# Altium PCB MSM8916_board.PcbDoc (part 1 of 2)
Units mil, origin at the board's own origin, x right, y up, seen from the top; angles counter-clockwise.
Board outline 1181.46 x 1183.49 mil, 2 copper layers (Top Layer, Bottom Layer); 218 components, 226 nets, 1647 pads, 0 vias.
Unrouted connection lines stored in the file: 1143.
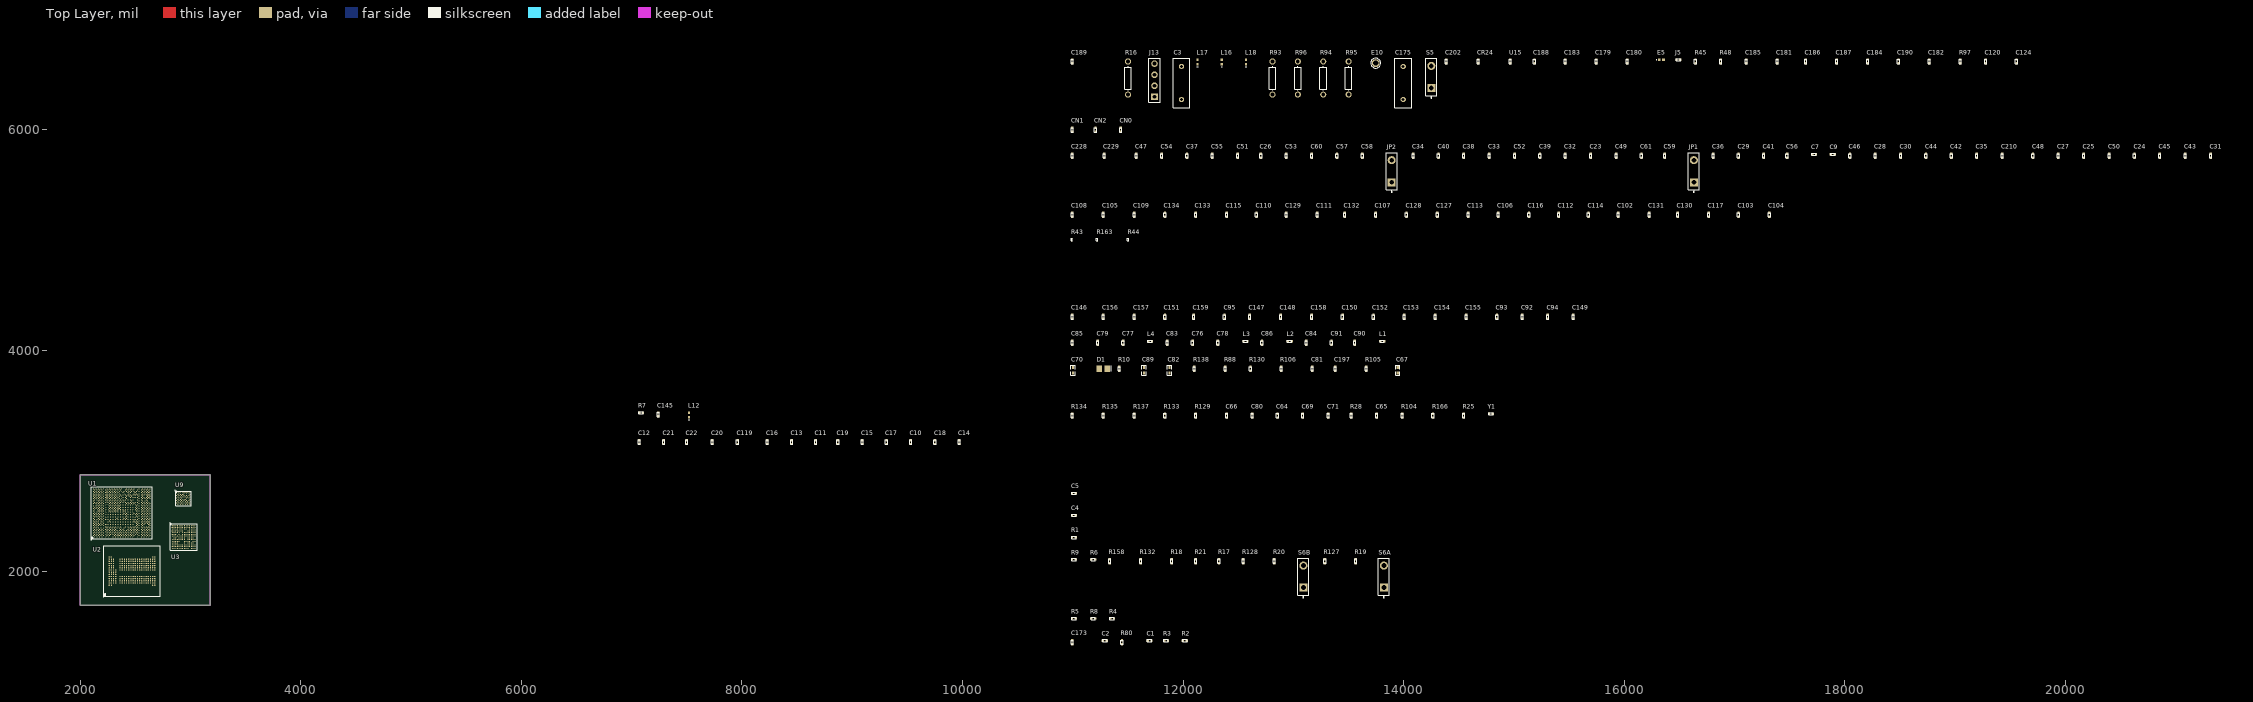
[diagram p0: Top Layer view]
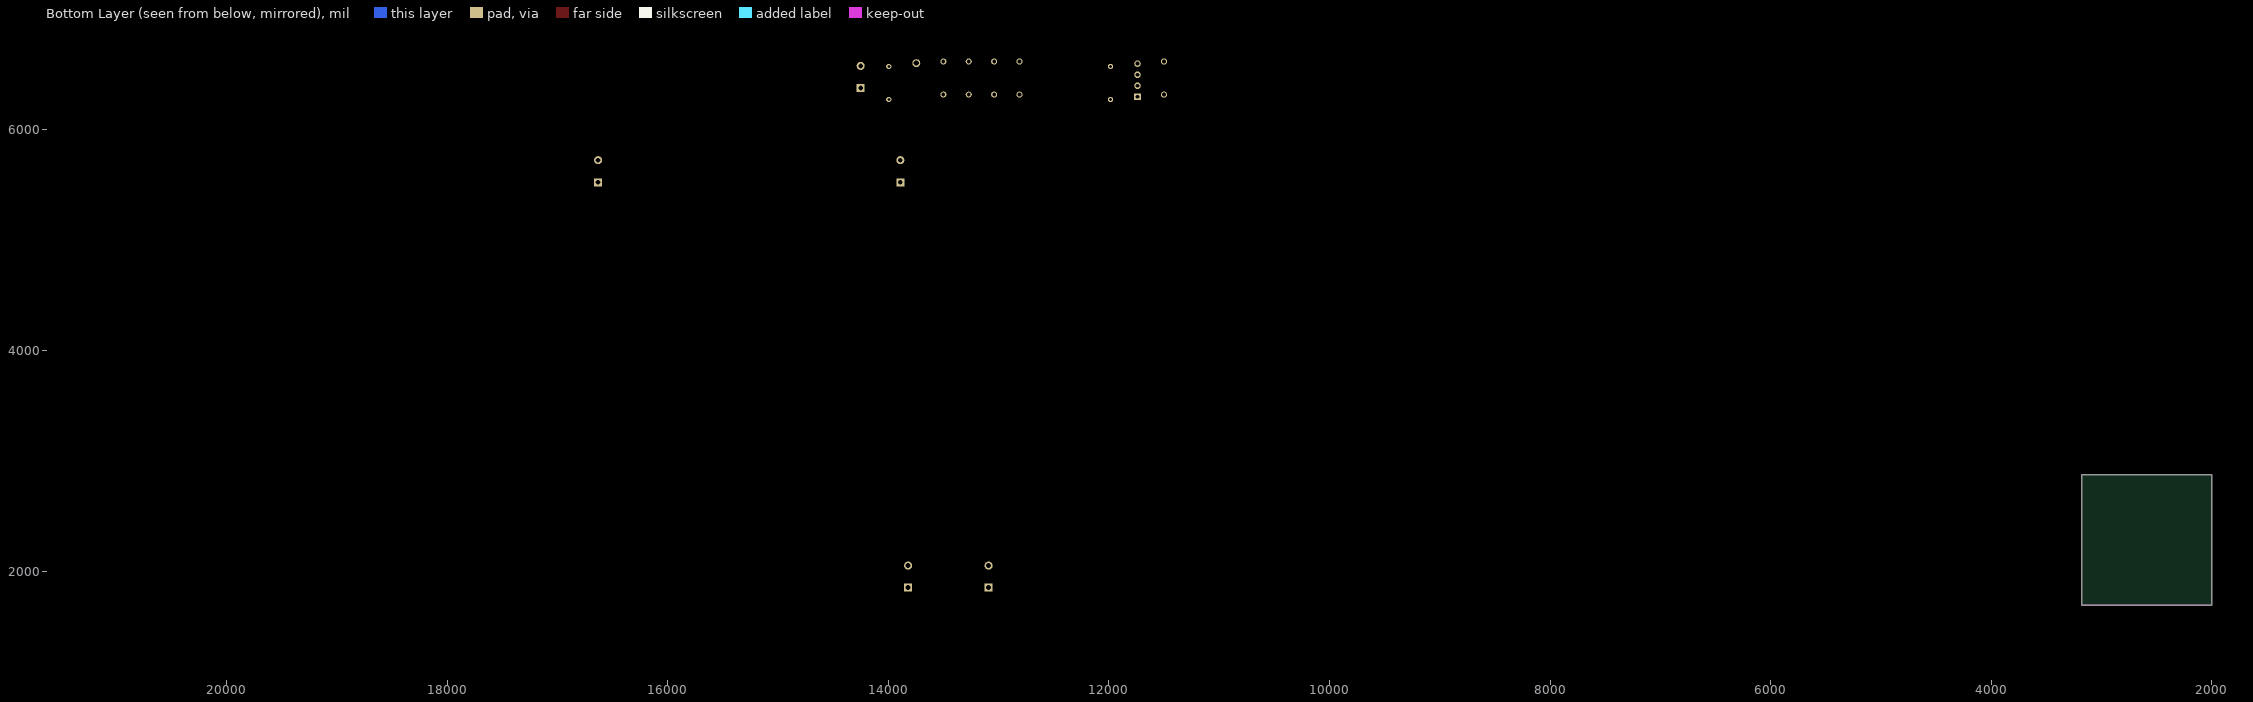
[diagram p1: Bottom Layer view, seen from below]

## Layer stack, top to bottom
Top Solder: solder mask 0.4, Solder Resist, Dk 3.5
Top Layer: signal copper 1.4
Dielectric 1: dielectric 12.6, FR-4, Dk 4.8
Bottom Layer: signal copper 1.4
Bottom Solder: solder mask 0.4, Solder Resist, Dk 3.5

## Board outline
2000,1690 2000,2871.1 2000.35,2873.49 3181.46,2873.49 3181.46,1692.38 3181.1,1690

## Design rules (kind name [scope] priority, off if disabled: settings)
Clearance [All] p1: gap=4 ignorepadtopadclearanceinfootprint=FALSE
DiffPairsRouting [All] p1: maxlimit=10 minlimit=10 mostfreqgap=10 toplayer_minwidth=10 toplayer_maxwidth=15 toplayer_prefwidth=15 bottomlayer_minwidth=10 bottomlayer_maxwidth=15 bottomlayer_prefwidth=15 maxuncoupledlength=500
PolygonConnect [All] p1: connectstyle=Relief reliefconductorwidth=10 reliefentries=4 polygonreliefangle="90 Angle" airgapwidth=10
RoutingVias [All] p1: holewidth=28 width=50 viastyle="Through Hole" minholewidth=28 minwidth=50 maxholewidth=28 maxwidth=50
SolderMaskExpansion [All] p1: expansion=4 istentingtop=FALSE
Width [All] p1: maxlimit=32 minlimit=6 preferedwidth=10
29 further rules are at their usual default settings.

## Classes and differential pairs
component class "SD Card_WCN_RF": C3 C120 C124 C175 C179 C180 C181 C182 C183 C184 C185 C186 C187 C188 C189 C190 C202 CR24 E5 E10 FL1 J5 J13 L16 L17 L18 R16 R45 R48 R93 R94 R95 R96 R97 S5 U9 U15
component class INTERFACE_PWR_LS_HS: CN0 CN1 CN2
component class BYPASS_CAP: C7 C9 C23 C24 C25 C26 C27 C28 C29 C30 C31 C32 C33 C34 C35 C36 C37 C38 C39 C40 C41 C42 C43 C44 C45 C46 C47 C48 C49 C50 C51 C52 C53 C54 C55 C56 C57 C58 C59 C60 C61 C210 C228 C229 JP1 JP2
component class "21 MEMORY_POWER": C102 C103 C104 C105 C106 C107 C108 C109 C110 C111 C112 C113 C114 C115 C116 C117 C127 C128 C129 C130 C131 C132 C133 C134
component class "20 MEMORY_CONTROL": R43 R44 R163 U2
component class "17 PM8916_LDO": C92 C93 C94 C95 C146 C147 C148 C149 C150 C151 C152 C153 C154 C155 C156 C157 C158 C159
component class "16 PM8916_SMPS": C76 C77 C78 C79 C83 C84 C85 C86 C90 C91 L1 L2 L3 L4
component class "15 PM8916_CHARGING GPIO": C67 C70 C81 C82 C89 C197 D1 R10 R88 R105 R106 R130 R138 U3
component class "14 PM8916_CONTROL CLOCK": C64 C65 C66 C69 C71 C80 R25 R28 R104 R129 R133 R134 R135 R137 R166 Y1
component class "13 MSM8916_GND NC": C145 L12 R7
component class "12 MSM8916_POWER3": C10 C11 C12 C13 C14 C15 C16 C17 C18 C19 C20 C21 C22 C119
component class "11 MSM8916_POWER2": C5
component class "10 MSM8916_POWER1": C4
component class 08_MSM8916_RF: R1
component class 07_MSM8916_GPIO: R6 R9 R17 R18 R19 R20 R21 R127 R128 R132 R158 S6A S6B
component class "06_MSM8916_EBIO LPDDR3": R4 R5 R8
component class "05 MSM8916_CONTROL": C1 C2 C173 R2 R3 R80 U1

## Components (designator, comment, footprint, x,y, rotation, side; value= is the part's Value field where it differs from the comment)
C1 "0.1UF" c0402 11695,1370 r0 top
C2 "33pF" c0402 11290,1370 r0 top
C3 "Cap" RAD-0.3 11985,6425 r90 top value=100pF
C4 "0.1uF" c0402 11010,2505 r0 top
C5 "0.1uF" c0402 11010,2705 r0 top
C7 "0.1uF" C0402 17720,5780 r0 top value="10% 6.3V"
C9 "0.1uF" C0402 17890,5780 r0 top value="10% 6.3V"
C10 "0.1uF" c0402 9530,3170 r90 top
C11 "0.1uF" c0402 8670,3170 r90 top
C12 "0.1uF" c0402 7070,3170 r90 top
C13 "0.1uF" c0402 8450,3170 r90 top
C14 "0.1uF" c0402 9970,3170 r90 top
C15 "0.047uF" c0402 9090,3170 r90 top
C16 "0.1uF" c0402 8230,3170 r90 top
C17 "0.047uF" c0402 9310,3170 r90 top
C18 "0.1uF" c0402 9750,3170 r90 top
C19 "0.047uF" c0402 8870,3170 r90 top
C20 "0.1uF" c0402 7730,3170 r90 top
C21 "0.1uF" c0402 7290,3170 r90 top
C22 "0.1uF" c0402 7500,3170 r90 top
C23 "1uF" C0402 15695,5765 r90 top value="10% 6.3V"
C24 "4700pF" C0402 20625,5765 r90 top value="20% 10V"
C25 "1uF" C0402 20165,5765 r90 top value="20% 6.3V"
C26 "4700pF" C0402 12705,5765 r90 top value="10% 6.3V"
C27 "1uF" C0402 19935,5765 r90 top value="20% 6.3V"
C28 "0.1uF" C0402 18275,5765 r90 top value="10% 6.3V"
C29 "0.1uF" C0402 17035,5765 r90 top value="10% 6.3V"
C30 "0.1uF" C0402 18505,5765 r90 top value="10% 6.3V"
C31 "0.047uF" C0402 21315,5765 r90 top value="20% 10V"
C32 "0.022uF" C0402 15465,5765 r90 top value="10% 6.3V"
C33 "0.022uF" C0402 14775,5765 r90 top value="10% 6.3V"
C34 "0.047uF" C0402 14085,5765 r90 top value="10% 6.3V"
C35 "0.1uF" C0402 19195,5765 r90 top value="10% 6.3V"
C36 "0.1uF" C0402 16805,5765 r90 top value="10% 6.3V"
C37 "2200pF" C0402 12035,5765 r90 top value="10% 6.3V"
C38 "0.047uF" C0402 14545,5765 r90 top value="10% 6.3V"
C39 "0.022uF" C0402 15235,5765 r90 top value="10% 6.3V"
C40 "0.047uF" C0402 14315,5765 r90 top value="10% 6.3V"
C41 "0.1uF" C0402 17265,5765 r90 top value="10% 6.3V"
C42 "0.1uF" C0402 18965,5765 r90 top value="10% 6.3V"
C43 "0.047uF" C0402 21085,5765 r90 top value="20% 10V"
C44 "0.1uF" C0402 18735,5765 r90 top value="10% 6.3V"
C45 "0.047uF" C0402 20855,5765 r90 top value="20% 10V"
C46 "0.1uF" C0402 18045,5765 r90 top value="10% 6.3V"
C47 "0.022uF" C0402 11575,5765 r90 top value="10% 6.3V"
C48 "1uF" C0402 19705,5765 r90 top value="20% 6.3V"
C49 "22uF" C0402 15925,5765 r90 top value="10% 6.3V"
C50 "1uF" C0402 20395,5765 r90 top value="20% 6.3V"
C51 "0.01uF" C0402 12495,5765 r90 top value="10% 6.3V"
C52 "0.022uF" C0402 15005,5765 r90 top value="10% 6.3V"
C53 "22uF" C0402 12935,5765 r90 top value="10% 6.3V"
C54 "2200pF" C0402 11805,5765 r90 top value="10% 6.3V"
C55 "2200pF" C0402 12265,5765 r90 top value="10% 6.3V"
C56 "0.1uF" C0402 17475,5765 r90 top value="10% 6.3V"
C57 "22uF" C0402 13395,5765 r90 top value="10% 6.3V"
C58 "4700pF" C0402 13625,5765 r90 top value="10% 6.3V"
C59 "4.7uF" C0402 16365,5765 r90 top value="10% 6.3V"
C60 "22uF" C0402 13165,5765 r90 top value="10% 6.3V"
C61 "22uF" C0402 16155,5765 r90 top value="10% 6.3V"
C64 "0.1uF" c0402 12855,3410 r90 top
C65 "0.1uF" c0402 13755,3410 r90 top
C66 "0.1uF" c0402 12395,3410 r90 top
C67 "0.1uF" 0402C 13945,3820 r90 top
C69 "1uF" c0402 13085,3410 r90 top
C70 "0.1uF" 0402C 11000,3820 r90 top value="6.3V 10%"
C71 "1uF" c0402 13315,3410 r90 top
C76 "22uF" c0402 12085,4070 r90 top
C77 "22uF" c0402 11455,4070 r90 top
C78 "22uF" c0402 12315,4070 r90 top
C79 "22uF" c0402 11225,4070 r90 top
C80 "1000pF" c0402 12625,3410 r90 top
C81 "47uF" c0402 13170,3835 r90 top
C82 "0.1uF" 0402C 11875,3820 r90 top
C83 "2.2uF" c0402 11855,4070 r90 top
C84 "2.2uF" c0402 13115,4070 r90 top
C85 "2.2uF" c0402 10995,4070 r90 top
C86 "2.2uF" c0402 12715,4070 r90 top
C89 "0.1uF" 0402C 11645,3820 r90 top
C90 "22uF" c0402 13555,4070 r90 top
C91 "22uF" c0402 13345,4070 r90 top
C92 "4.7uF" c0402 15075,4305 r90 top
C93 "4.7uF" c0402 14845,4305 r90 top
C94 "4.7uF" c0402 15305,4305 r90 top
C95 "4.7uF" c0402 12375,4305 r90 top
C102 "0.1uF 10% 6.3V" c0402 15945,5230 r90 top
C103 "0.1uF 10% 6.3V" C0402 17035,5230 r90 top
C104 "0.1uF 10% 6.3V" c0402 17315,5230 r90 top
C105 "0.1uF 10% 6.3V" C0402 11275,5230 r90 top
C106 "0.1uF 10% 6.3V" C0402 14855,5230 r90 top
C107 "2.2uF 10% 6.3V" c0402 13745,5230 r90 top
C108 "0.1uF 10% 6.3V" C0402 10995,5230 r90 top
C109 "0.1uF 10% 6.3V" C0402 11555,5230 r90 top
C110 "1uF 10% 6.3V" C0402 12665,5230 r90 top
C111 "0.1uF 10% 6.3V" C0402 13215,5230 r90 top
C112 "0.1uF 10% 6.3V" C0402 15405,5230 r90 top
C113 "0.1uF 10% 6.3V" c0402 14585,5230 r90 top
C114 "0.1uF 10% 6.3V" C0402 15675,5230 r90 top
C115 "1uF 10% 6.3V" C0402 12395,5230 r90 top
C116 "0.1uF 10% 6.3V" C0402 15135,5230 r90 top
C117 "0.1uF 10% 6.3V" C0402 16765,5230 r90 top
C119 "0.1uF" c0402 7960,3170 r90 top
C120 "33pF" C0402 19275,6620 r90 top value="5% 50V"
C124 "1uF" C0402 19555,6620 r90 top value="20% 6.3V"
C127 "2.2uF 10% 6.3V" c0402 14305,5230 r90 top
C128 "0.1uF 10% 6.3V" c0402 14025,5230 r90 top
C129 "0.1uF 10% 6.3V" C0402 12935,5230 r90 top
C130 "1uF 10% 6.3V" C0402 16485,5230 r90 top
C131 "1uF 10% 6.3V" C0402 16225,5230 r90 top
C132 "0.1uF 10% 6.3V" C0402 13465,5230 r90 top
C133 "4.7uF 10% 6.3V" C0402 12115,5230 r90 top
C134 "4.7uF 10% 6.3V" C0402 11835,5230 r90 top
C145 "2.2uF" C0402 7240,3420 r90 top value="10% 10V"
C146 "1.0uF" c0402 10995,4305 r90 top
C147 "1.0uF" c0402 12605,4305 r90 top
C148 "1.0uF" c0402 12885,4305 r90 top
C149 "1.0uF" c0402 15535,4305 r90 top
C150 "1.0uF" c0402 13445,4305 r90 top
C151 "1.0uF" c0402 11835,4305 r90 top
C152 "1.0uF" c0402 13725,4305 r90 top
C153 "1.0uF" c0402 14005,4305 r90 top
C154 "1.0uF" c0402 14285,4305 r90 top
C155 "1.0uF" c0402 14565,4305 r90 top
C156 "4.7uF" c0402 11275,4305 r90 top
C157 "4.7uF" c0402 11555,4305 r90 top
C158 "4.7uF" c0402 13165,4305 r90 top
C159 "4.7uF" c0402 12095,4305 r90 top
C173 "33pF" c0402 10995,1355 r90 top
C175 "18pF" RAD-0.3 13995,6425 r90 top value="5% 25V"
C179 "10% 16V" C0402 15745,6620 r90 top value=0.47uF
C180 "10% 16V" C0402 16025,6620 r90 top value=0.47uF
C181 "10% 16V" C0402 17385,6620 r90 top value=0.01uF
C182 "10% 16V" C0402 18765,6620 r90 top value=100pF
C183 "100pF" C0402 15465,6620 r90 top value="10% 25V"
C184 "10% 16V" C0402 18205,6620 r90 top value=100pF
C185 "10% 16V" C0402 17105,6620 r90 top value=0.01uF
C186 "10% 16V" C0402 17645,6620 r90 top value=0.01uF
C187 "10% 16V" C0402 17925,6620 r90 top value=0.01uF
C188 "10uF" C0402 15185,6620 r90 top value="20% 6.3V"
C189 "5% 50V" C0402 10995,6620 r90 top value=82pF
C190 "10% 16V" C0402 18485,6620 r90 top value=0.022uF
C197 "4.7uF" C0402 13380,3835 r90 top value="16V 10%"
C202 "10% 16V" C0402 14385,6620 r90 top value=4.7uF
C210 "1uF" C0402 19425,5765 r90 top value="20% 6.3V"
C228 "0.022uF" C0402 10995,5765 r90 top value="10% 6.3V"
C229 "0.022uF" C0402 11285,5765 r90 top value="10% 6.3V"
CN0 "CON24_0" c0402 11435,6000 r90 top
CN1 "CON24_0" c0402 10995,6000 r90 top
CN2 "CON24_0" c0402 11205,6000 r90 top
CR24 "ESD7C5" c0402 14675,6620 r90 top
D1 "LED0" LED_0805 11275,3835 r0 top
E5 "240 OHM @ 100MHZ" 0402-A 16335,6635 r0 top value=25%
E10 "ANTENNA" TP 13745,6605 r0 top
J5 "SCHA4B0415" c0402 16490,6635 r0 top
J13 "0734120110" HDR1X4 11740,6300 r90 top
JP1 "SW-PB" SPST-2 16630,5625 r90 top
JP2 "SW-PB" SPST-2 13890,5625 r90 top
L1 "1.0uH 20%" c0402 13805,4085 r0 top
L2 "1.0uH 20%" c0402 12965,4085 r0 top
L3 "2.2uH 20%" c0402 12565,4085 r0 top
L4 "2.2uH 20%" c0402 11700,4085 r0 top
L12 "2.2uH" 0402-A 7520,3415 r90 top value=20%
L16 "5.1NH" 0402-A 12350,6615 r90 top value=3%
L17 "5.1NH" 0402-A 12130,6615 r90 top value=3%
L18 "2.7NH" 0402-A 12570,6615 r90 top value=+-0.1NH
R1 "3.92K" r0402 11010,2305 r0 top value="1% 0.05W"
R2 "0K" r0402 12015,1370 r0 top value="5% 0.05W"
R3 "0K" r0402 11845,1370 r0 top value="5% 0.05W"
R4 "R240" c0402 11355,1570 r0 top
R5 "0" c0402 11010,1570 r0 top
R6 "2K" r0402 11185,2105 r0 top value="5% 0.05W"
R7 "0" c0402 7085,3435 r0 top
R8 "R240" c0402 11185,1570 r0 top
R9 "2K" r0402 11010,2105 r0 top value="5% 0.05W"
R10 "Res1" r0402 11420,3835 r90 top value=1K
R16 "0" AXIAL-0.3 11500,6470 r90 top value="5% 0.05W"
R17 "10K" r0402 12325,2090 r90 top value="5% 0.05W"
R18 "10K" r0402 11895,2090 r90 top value="5% 0.05W"
R19 "10K" r0402 13565,2090 r90 top value="5% 0.05W"
R20 "10K" r0402 12825,2090 r90 top value="5% 0.05W"
R21 "10K" r0402 12115,2090 r90 top value="5% 0.05W"
R25 "10K" r0402 14545,3410 r90 top value="5% 0.05W"
R28 "100K" c0402 13525,3410 r90 top
R43 "R240 1% 0.05W" R0201 10990,5005 r90 top
R44 "5% 10K 0.05W" R0201 11500,5005 r90 top
R45 "10K" r0402 16645,6620 r90 top value="5% 0.05W"
R48 "1M" r0402 16875,6620 r90 top value="5% 0.05W"
R80 "200R" c0402 11445,1355 r90 top
R88 "0" c0402 12380,3835 r90 top
R93 "5% 0.05W" AXIAL-0.3 12810,6470 r90 top value=0
R94 "0" AXIAL-0.3 13270,6470 r90 top value="5% 0.05W"
R95 "0" AXIAL-0.3 13500,6470 r90 top value="5% 0.05W"
R96 "0" AXIAL-0.3 13040,6470 r90 top value="5% 0.05W"
R97 "0" r0402 19045,6620 r90 top value="5% 0.05W"
R104 "0" c0402 13985,3410 r90 top
R105 "47K" r0402 13660,3835 r90 top value="1% 0.05W"
R106 "0" c0402 12890,3835 r90 top
R127 "0" r0402 13285,2090 r90 top value="5% 0.1W"
R128 "0" r0402 12545,2090 r90 top value="5% 0.1W"
R129 "1% 0.05W" r0402 12115,3410 r90 top value=100K
R130 "0" c0402 12610,3835 r90 top
R132 "10K" r0402 11615,2090 r90 top value="5% 0.05W"
R133 "1% 0.05W" r0402 11835,3410 r90 top value=90.9K
R134 "1% 0.063W" r0402 10995,3410 r90 top value=68.1K
R135 "1% 0.05W" r0402 11275,3410 r90 top value=100K
R137 "1% 0.05W" r0402 11555,3410 r90 top value=16.2K
R138 "0" c0402 12100,3835 r90 top
R158 "0" r0402 11335,2090 r90 top value="5% 0.05W"
R163 "0 5% 0.05W" R0201 11220,5005 r90 top
R166 "0" r0402 14265,3410 r90 top value="5% 0.05W"
S5 "MM8030" SPST-2 14250,6480 r90 top
S6A "SW-PB" SPST-2 13820,1950 r90 top
S6B "SW-PB" SPST-2 13090,1950 r90 top
U1 "ASIC_MSM8936_760PIN" MSM-8916-0-760NSP-TR-00-0 2376.57,2528.13 r90 top
U2 "KMQ5X000SM-B315" KMQ5X000SM-B315 2470,2000 r90 top
U3 "ASIC_PM8916" PM-8916-0-176NSP-TR-00-0 2937.13,2308.62 r0 top
U9 "ASIC_WCN3620_80_WL006_1" WCN-3620-0-61WLNSP-TR-05-0 2935.63,2659.78 r0 top
U15 "TPD6E001RSER" c0402 14965,6620 r90 top
Y1 "crystal_4pin_thermistor_gnd" c0402 14790,3425 r0 top

## Footprints (in the part's own frame and the unit in brackets; to place one, negate y for a bottom-side part, rotate by r counter-clockwise, add the part's x,y. Pads: shape width x height; smd on the part's side, far side on the other; paste and mask are expansions set on the pad)
0402-A [mm] "Chip Inductor, Body 1.0x0.5mm, IPC High Density"
  rect 0.6x0.5 smd: 1(-0.5,0) 2(0.5,0)
  silkscreen extent -1.1,-0.15 -1.1,0.15, body extent -0.55,-0.3 0.55,0.3, height 0.55
0402C [mil]
  rect 25x20 smd: 1(-25,0) 2(25,0)
  silkscreen extent -45,-20 45,20, body extent -20,-12 20,12, height 8
AXIAL-0.3 [mm] "Axial Device, Thru-Hole; 2 Leads; 0.3 in Pin Spacing"
  round 1.4 hole 0.85: 1(-3.81,0) 2(3.81,0)
  silkscreen extent -2.77,-0.76 2.77,0.76
c0402 [mm]
  rect 0.55x0.55 smd paste-0.05 mask+0.05: 1(-0.45,0) 2(0.45,0)
  silkscreen extent -0.5,-0.25 0.5,0.25
C0402 [mm]
  rect 0.55x0.55 smd paste-0.05 mask+0.05: 1(-0.45,0) 2(0.45,0)
  silkscreen extent -0.5,-0.25 0.5,0.25
HDR1X4 [mm] "Connector; Header; 4 Position"
  rect 1.5x1.5 hole 0.9: 1(0,0)
  round 1.5 hole 0.9: 2(2.54,0) 3(5.08,0) 4(7.62,0)
  silkscreen extent -1.27,-1.27 8.89,1.27
KMQ5X000SM-B315 [mm]
  round 0.3 smd mask+0.05: A1(-3.25,5.25) A2(-2.75,5.25) A3(-2.25,5.25) A4(-1.75,5.25) A5(-1.25,5.25) A6(-0.75,5.25) A7(-0.25,5.25) A8(0.25,5.25) A9(0.75,5.25) A10(1.25,5.25) A11(1.75,5.25) A12(2.25,5.25) A13(2.75,5.25) A14(3.25,5.25) AA1(-3.25,-4.75) AA2(-2.75,-4.75) AA3(-2.25,-4.75) AA4(-1.75,-4.75) AA5(-1.25,-4.75) AA8(0.25,-4.75) AA9(0.75,-4.75) AA10(1.25,-4.75) AA11(1.75,-4.75) AA12(2.25,-4.75) AA13(2.75,-4.75) AA14(3.25,-4.75) AB1(-3.25,-5.25) AB2(-2.75,-5.25) AB3(-2.25,-5.25) AB4(-1.75,-5.25) AB5(-1.25,-5.25) AB8(0.25,-5.25) AB9(0.75,-5.25) AB10(1.25,-5.25) AB11(1.75,-5.25) AB12(2.25,-5.25) AB13(2.75,-5.25) AB14(3.25,-5.25) B1(-3.25,4.75) B2(-2.75,4.75) B3(-2.25,4.75) B4(-1.75,4.75) B5(-1.25,4.75) B6(-0.75,4.75) B7(-0.25,4.75) B8(0.25,4.75) B9(0.75,4.75) B10(1.25,4.75) B11(1.75,4.75) B12(2.25,4.75) B13(2.75,4.75) B14(3.25,4.75) C2(-2.75,4.25) C3(-2.25,4.25) C4(-1.75,4.25) C5(-1.25,4.25) C6(-0.75,4.25) C7(-0.25,4.25) C8(0.25,4.25) C9(0.75,4.25) C10(1.25,4.25) C11(1.75,4.25) C12(2.25,4.25) C13(2.75,4.25) D2(-2.75,3.75) D3(-2.25,3.75) D4(-1.75,3.75) D5(-1.25,3.75) D6(-0.75,3.75) D7(-0.25,3.75) D8(0.25,3.75) F2(-2.75,2.75) F3(-2.25,2.75) F4(-1.75,2.75) F5(-1.25,2.75) F8(0.25,2.75) F9(0.75,2.75) F10(1.25,2.75) F11(1.75,2.75) F12(2.25,2.75) F13(2.75,2.75) G2(-2.75,2.25) G3(-2.25,2.25) G4(-1.75,2.25) G5(-1.25,2.25) G8(0.25,2.25) G9(0.75,2.25) G10(1.25,2.25) G11(1.75,2.25) G12(2.25,2.25) G13(2.75,2.25) H2(-2.75,1.75) H3(-2.25,1.75) H4(-1.75,1.75) H5(-1.25,1.75) H8(0.25,1.75) H9(0.75,1.75) H10(1.25,1.75) H11(1.75,1.75) H12(2.25,1.75) H13(2.75,1.75) J2(-2.75,1.25) J3(-2.25,1.25) J4(-1.75,1.25) J5(-1.25,1.25) J8(0.25,1.25) J9(0.75,1.25) J10(1.25,1.25) J11(1.75,1.25) J12(2.25,1.25) J13(2.75,1.25) K2(-2.75,0.75) K3(-2.25,0.75) K4(-1.75,0.75) K5(-1.25,0.75) K8(0.25,0.75) K9(0.75,0.75) K10(1.25,0.75) K11(1.75,0.75) K12(2.25,0.75) K13(2.75,0.75) L2(-2.75,0.25) L3(-2.25,0.25) L4(-1.75,0.25) L5(-1.25,0.25) L8(0.25,0.25) L9(0.75,0.25) L10(1.25,0.25) L11(1.75,0.25) L12(2.25,0.25) L13(2.75,0.25) M2(-2.75,-0.25) M3(-2.25,-0.25) M4(-1.75,-0.25) M5(-1.25,-0.25) M8(0.25,-0.25) M9(0.75,-0.25) M10(1.25,-0.25) M11(1.75,-0.25) M12(2.25,-0.25) M13(2.75,-0.25) N2(-2.75,-0.75) N3(-2.25,-0.75) N4(-1.75,-0.75) N5(-1.25,-0.75) N8(0.25,-0.75) N9(0.75,-0.75) N10(1.25,-0.75) N11(1.75,-0.75) N12(2.25,-0.75) N13(2.75,-0.75) P2(-2.75,-1.25) P3(-2.25,-1.25) P4(-1.75,-1.25) P5(-1.25,-1.25) P8(0.25,-1.25) P9(0.75,-1.25) P10(1.25,-1.25) P11(1.75,-1.25) P12(2.25,-1.25) P13(2.75,-1.25) R2(-2.75,-1.75) R3(-2.25,-1.75) R4(-1.75,-1.75) R5(-1.25,-1.75) R8(0.25,-1.75) R9(0.75,-1.75) R10(1.25,-1.75) R11(1.75,-1.75) R12(2.25,-1.75) R13(2.75,-1.75) T2(-2.75,-2.25) T3(-2.25,-2.25) T4(-1.75,-2.25) T5(-1.25,-2.25) T8(0.25,-2.25) T9(0.75,-2.25) T10(1.25,-2.25) T11(1.75,-2.25) T12(2.25,-2.25) T13(2.75,-2.25) U2(-2.75,-2.75) U3(-2.25,-2.75) U4(-1.75,-2.75) U5(-1.25,-2.75) U8(0.25,-2.75) U9(0.75,-2.75) U10(1.25,-2.75) U11(1.75,-2.75) U12(2.25,-2.75) U13(2.75,-2.75) V2(-2.75,-3.25) V3(-2.25,-3.25) V4(-1.75,-3.25) V5(-1.25,-3.25) V8(0.25,-3.25) V9(0.75,-3.25) V10(1.25,-3.25) V11(1.75,-3.25) V12(2.25,-3.25) V13(2.75,-3.25) W2(-2.75,-3.75) W3(-2.25,-3.75) W4(-1.75,-3.75) W5(-1.25,-3.75) W8(0.25,-3.75) W9(0.75,-3.75) W10(1.25,-3.75) W11(1.75,-3.75) W12(2.25,-3.75) W13(2.75,-3.75) Y2(-2.75,-4.25) Y3(-2.25,-4.25) Y4(-1.75,-4.25) Y5(-1.25,-4.25) Y8(0.25,-4.25) Y9(0.75,-4.25) Y10(1.25,-4.25) Y11(1.75,-4.25) Y12(2.25,-4.25) Y13(2.75,-4.25)
  silkscreen extent -5.92,-6.55 5.8,6.66
LED_0805 [mm] "贴片二极管"
  rect 1.3x1.5 smd: 1(-0.95,0) 2(0.95,0)
  silkscreen extent 1.91,-0.64 1.91,0.64
MSM-8916-0-760NSP-TR-00-0 [mm]
  round 0.24 smd paste+0.005 mask+0.038: A2(-5.235,6.509) A4(-4.67,6.509) A6(-4.103,6.509) A8(-3.538,6.509) A10(-2.972,6.509) A12(-2.405,6.509) A14(-1.84,6.509) A16(-1.274,6.509) A18(-0.707,6.509) A20(-0.142,6.509) A22(0.425,6.509) A24(0.991,6.509) A26(1.556,6.509) A28(2.123,6.509) A30(2.689,6.509) A32(3.254,6.509) A34(3.821,6.509) A36(4.387,6.509) A38(4.952,6.509) A40(5.519,6.509) AA2(-5.235,0.566) AA4(-4.67,0.566) AA6(-4.103,0.566) AA8(-3.538,0.566) AA24(0.991,0.566) AA26(1.556,0.566) AA28(2.123,0.566) AA30(2.689,0.566) AA32(3.254,0.566) AA34(3.821,0.566) AA36(4.387,0.566) AA38(4.952,0.566) AA40(5.519,0.566) AB1(-5.519,0.283) AB3(-4.952,0.283) AB5(-4.387,0.283) AB7(-3.821,0.283) AB9(-3.254,0.283) AB11(-2.689,0.283) AB13(-2.123,0.283) AB15(-1.556,0.283) AB17(-0.991,0.283) AB19(-0.425,0.283) AB21(0.142,0.283) AB23(0.707,0.283) AB25(1.274,0.283) AB27(1.84,0.283) AB29(2.405,0.283) AB31(2.972,0.283) AB35(4.103,0.283) AB39(5.235,0.283) AC2(-5.235,0) AC4(-4.67,0) AC6(-4.103,0) AC8(-3.538,0) AC30(2.689,0) AC32(3.254,0) AC34(3.821,0) AC38(4.952,0) AC40(5.519,0) AD1(-5.519,-0.283) AD3(-4.952,-0.283) AD5(-4.387,-0.283) AD7(-3.821,-0.283) AD11(-2.689,-0.283) AD13(-2.123,-0.283) AD15(-1.556,-0.283) AD17(-0.991,-0.283) AD19(-0.425,-0.283) AD21(0.142,-0.283) AD23(0.707,-0.283) AD25(1.274,-0.283) AD27(1.84,-0.283) AD29(2.405,-0.283) AD31(2.972,-0.283) AD33(3.538,-0.283) AD35(4.103,-0.283) AD37(4.67,-0.283) AE2(-5.235,-0.566) AE4(-4.67,-0.566) AE6(-4.103,-0.566) AE8(-3.538,-0.566) AE16(-1.274,-0.566) AE20(-0.142,-0.566) AE22(0.425,-0.566) AE30(2.689,-0.566) AE36(4.387,-0.566) AE38(4.952,-0.566) AF1(-5.519,-0.849) AF3(-4.952,-0.849) AF5(-4.387,-0.849) AF9(-3.254,-0.849) AF11(-2.689,-0.849) AF13(-2.123,-0.849) AF15(-1.556,-0.849) AF17(-0.991,-0.849) AF19(-0.425,-0.849) AF21(0.142,-0.849) AF23(0.707,-0.849) AF25(1.274,-0.849) AF27(1.84,-0.849) AF29(2.405,-0.849) AF31(2.972,-0.849) AF33(3.538,-0.849) AF35(4.103,-0.849) AF39(5.235,-0.849) AG2(-5.235,-1.132) AG4(-4.67,-1.132) AG6(-4.103,-1.132) AG16(-1.274,-1.132) AG18(-0.707,-1.132) AG20(-0.142,-1.132) AG28(2.123,-1.132) AG32(3.254,-1.132) AG34(3.821,-1.132) AG38(4.952,-1.132) AG40(5.519,-1.132) AH1(-5.519,-1.415) AH3(-4.952,-1.415) AH5(-4.387,-1.415) AH7(-3.821,-1.415) AH9(-3.254,-1.415) AH11(-2.689,-1.415) AH13(-2.123,-1.415) AH15(-1.556,-1.415) AH17(-0.991,-1.415) AH19(-0.425,-1.415) AH21(0.142,-1.415) AH23(0.707,-1.415) AH25(1.274,-1.415) AH27(1.84,-1.415) AH29(2.405,-1.415) AH31(2.972,-1.415) AH35(4.103,-1.415) AH37(4.67,-1.415) AH39(5.235,-1.415) AJ2(-5.235,-1.698) AJ4(-4.67,-1.698) AJ6(-4.103,-1.698) AJ8(-3.538,-1.698) AJ28(2.123,-1.698) AJ34(3.821,-1.698) AJ36(4.387,-1.698) AJ38(4.952,-1.698) AJ40(5.519,-1.698) AK1(-5.519,-1.981) AK3(-4.952,-1.981) AK5(-4.387,-1.981) AK7(-3.821,-1.981) AK9(-3.254,-1.981) AK11(-2.689,-1.981) AK13(-2.123,-1.981) AK15(-1.556,-1.981) AK17(-0.991,-1.981) AK19(-0.425,-1.981) AK21(0.142,-1.981) AK23(0.707,-1.981) AK25(1.274,-1.981) AK27(1.84,-1.981) AK29(2.405,-1.981) AK31(2.972,-1.981) AK33(3.538,-1.981) AK35(4.103,-1.981) AK37(4.67,-1.981) AK39(5.235,-1.981) AL2(-5.235,-2.264) AL4(-4.67,-2.264) AL6(-4.103,-2.264) AL8(-3.538,-2.264) AL28(2.123,-2.264) AL30(2.689,-2.264) AL34(3.821,-2.264) AL38(4.952,-2.264) AL40(5.519,-2.264) AM1(-5.519,-2.547) AM3(-4.952,-2.547) AM5(-4.387,-2.547) AM7(-3.821,-2.547) AM9(-3.254,-2.547) AM11(-2.689,-2.547) AM13(-2.123,-2.547) AM15(-1.556,-2.547) AM17(-0.991,-2.547) AM19(-0.425,-2.547) AM21(0.142,-2.547) AM23(0.707,-2.547) AM25(1.274,-2.547) AM27(1.84,-2.547) AM29(2.405,-2.547) AM31(2.972,-2.547) AM33(3.538,-2.547) AM35(4.103,-2.547) AM39(5.235,-2.547) AN2(-5.235,-2.83) AN4(-4.67,-2.83) AN6(-4.103,-2.83) AN8(-3.538,-2.83) AN14(-1.84,-2.83) AN20(-0.142,-2.83) AN28(2.123,-2.83) AN36(4.387,-2.83) AN38(4.952,-2.83) AN40(5.519,-2.83) AP3(-4.952,-3.113) AP5(-4.387,-3.113) AP7(-3.821,-3.113) AP9(-3.254,-3.113) AP13(-2.123,-3.113) AP15(-1.556,-3.113) AP17(-0.991,-3.113) AP19(-0.425,-3.113) AP23(0.707,-3.113) AP25(1.274,-3.113) AP27(1.84,-3.113) AP29(2.405,-3.113) AP33(3.538,-3.113) AP35(4.103,-3.113) AP37(4.67,-3.113) AR4(-4.67,-3.396) AR6(-4.103,-3.396) AR8(-3.538,-3.396) AR10(-2.972,-3.396) AR12(-2.405,-3.396) AR14(-1.84,-3.396) AR18(-0.707,-3.396) AR20(-0.142,-3.396) AR22(0.425,-3.396) AR24(0.991,-3.396) AR26(1.556,-3.396) AR36(4.387,-3.396) AR38(4.952,-3.396) AT1(-5.519,-3.679) AT3(-4.952,-3.679) AT5(-4.387,-3.679) AT7(-3.821,-3.679) AT9(-3.254,-3.679) AT11(-2.689,-3.679) AT13(-2.123,-3.679) AT15(-1.556,-3.679) AT17(-0.991,-3.679) AT19(-0.425,-3.679) AT21(0.142,-3.679) AT23(0.707,-3.679) AT25(1.274,-3.679) AT27(1.84,-3.679) AT29(2.405,-3.679) AT31(2.972,-3.679) AT33(3.538,-3.679) AT35(4.103,-3.679) AT39(5.235,-3.679) AU2(-5.235,-3.962) AU4(-4.67,-3.962) AU6(-4.103,-3.962) AU8(-3.538,-3.962) AU10(-2.972,-3.962) AU12(-2.405,-3.962) AU14(-1.84,-3.962) AU16(-1.274,-3.962) AU18(-0.707,-3.962) AU20(-0.142,-3.962) AU22(0.425,-3.962) AU24(0.991,-3.962) AU26(1.556,-3.962) AU28(2.123,-3.962) AU30(2.689,-3.962) AU32(3.254,-3.962) AU34(3.821,-3.962) AU36(4.387,-3.962) AU38(4.952,-3.962) AU40(5.519,-3.962) AV1(-5.519,-4.528) AV3(-4.952,-4.528) AV5(-4.387,-4.528) AV7(-3.821,-4.528) AV9(-3.254,-4.528) AV11(-2.689,-4.528) AV13(-2.123,-4.528) AV15(-1.556,-4.528) AV17(-0.991,-4.528) AV19(-0.425,-4.528) AV21(0.142,-4.528) AV23(0.707,-4.528) AV25(1.274,-4.528) AV27(1.84,-4.528) AV29(2.405,-4.528) AV31(2.972,-4.528) AV33(3.538,-4.528) AV35(4.103,-4.528) AV37(4.67,-4.528) AV39(5.235,-4.528) AW2(-5.235,-4.811) AW4(-4.67,-4.811) AW6(-4.103,-4.811) AW8(-3.538,-4.811) AW10(-2.972,-4.811) AW12(-2.405,-4.811) AW14(-1.84,-4.811) AW16(-1.274,-4.811) AW18(-0.707,-4.811) AW20(-0.142,-4.811) AW22(0.425,-4.811) AW24(0.991,-4.811) AW26(1.556,-4.811) AW28(2.123,-4.811) AW30(2.689,-4.811) AW32(3.254,-4.811) AW34(3.821,-4.811) AW36(4.387,-4.811) AW38(4.952,-4.811) AW40(5.519,-4.811) AY1(-5.519,-5.094) AY3(-4.952,-5.094) AY5(-4.387,-5.094) AY7(-3.821,-5.094) AY9(-3.254,-5.094) AY11(-2.689,-5.094) AY13(-2.123,-5.094) AY15(-1.556,-5.094) AY17(-0.991,-5.094) AY19(-0.425,-5.094) AY21(0.142,-5.094) AY23(0.707,-5.094) AY25(1.274,-5.094) AY27(1.84,-5.094) AY29(2.405,-5.094) AY33(3.538,-5.094) AY35(4.103,-5.094) AY37(4.67,-5.094) AY39(5.235,-5.094) B1(-5.519,6.226) B3(-4.952,6.226) B5(-4.387,6.226) B7(-3.821,6.226) B9(-3.254,6.226) B11(-2.689,6.226) B13(-2.123,6.226) B15(-1.556,6.226) B17(-0.991,6.226) B19(-0.425,6.226) B21(0.142,6.226) B23(0.707,6.226) B25(1.274,6.226) B29(2.405,6.226) B31(2.972,6.226) B33(3.538,6.226) B35(4.103,6.226) B37(4.67,6.226) B39(5.235,6.226) BA2(-5.235,-5.377) BA4(-4.67,-5.377) BA6(-4.103,-5.377) BA8(-3.538,-5.377) BA12(-2.405,-5.377) BA14(-1.84,-5.377) BA16(-1.274,-5.377) BA18(-0.707,-5.377) BA20(-0.142,-5.377) BA22(0.425,-5.377) BA24(0.991,-5.377) BA26(1.556,-5.377) BA28(2.123,-5.377) BA30(2.689,-5.377) BA32(3.254,-5.377) BA36(4.387,-5.377) BA38(4.952,-5.377) BA40(5.519,-5.377) BB1(-5.519,-5.66) BB3(-4.952,-5.66) BB5(-4.387,-5.66) BB7(-3.821,-5.66) BB9(-3.254,-5.66) BB13(-2.123,-5.66) BB15(-1.556,-5.66) BB17(-0.991,-5.66) BB19(-0.425,-5.66) BB21(0.142,-5.66) BB23(0.707,-5.66) BB25(1.274,-5.66) BB27(1.84,-5.66) BB29(2.405,-5.66) BB31(2.972,-5.66) BB33(3.538,-5.66) BB35(4.103,-5.66) BB37(4.67,-5.66) BB39(5.235,-5.66) BC2(-5.235,-5.943) BC4(-4.67,-5.943) BC6(-4.103,-5.943) BC8(-3.538,-5.943) BC12(-2.405,-5.943) BC14(-1.84,-5.943) BC16(-1.274,-5.943) BC18(-0.707,-5.943) BC20(-0.142,-5.943) BC22(0.425,-5.943) BC24(0.991,-5.943) BC26(1.556,-5.943) BC28(2.123,-5.943) BC30(2.689,-5.943) BC32(3.254,-5.943) BC34(3.821,-5.943) BC36(4.387,-5.943) BC38(4.952,-5.943) BC40(5.519,-5.943) BD1(-5.519,-6.226) BD3(-4.952,-6.226) BD5(-4.387,-6.226) BD7(-3.821,-6.226) BD9(-3.254,-6.226) BD11(-2.689,-6.226) BD13(-2.123,-6.226) BD15(-1.556,-6.226) BD17(-0.991,-6.226) BD19(-0.425,-6.226) BD21(0.142,-6.226) BD23(0.707,-6.226) BD25(1.274,-6.226) BD27(1.84,-6.226) BD29(2.405,-6.226) BD33(3.538,-6.226) BD35(4.103,-6.226) BD37(4.67,-6.226) BD39(5.235,-6.226) BE2(-5.235,-6.509) BE4(-4.67,-6.509) BE6(-4.103,-6.509) BE8(-3.538,-6.509) BE10(-2.972,-6.509) BE12(-2.405,-6.509) BE14(-1.84,-6.509) BE16(-1.274,-6.509) BE18(-0.707,-6.509) BE20(-0.142,-6.509) BE22(0.425,-6.509) BE24(0.991,-6.509) BE26(1.556,-6.509) BE28(2.123,-6.509) BE32(3.254,-6.509) BE34(3.821,-6.509) BE36(4.387,-6.509) BE38(4.952,-6.509) BE40(5.519,-6.509) C2(-5.235,5.943) C4(-4.67,5.943) C6(-4.103,5.943) C8(-3.538,5.943) C10(-2.972,5.943) C12(-2.405,5.943) C14(-1.84,5.943) C18(-0.707,5.943) C20(-0.142,5.943) C24(0.991,5.943) C26(1.556,5.943) C28(2.123,5.943) C32(3.254,5.943) C34(3.821,5.943) C36(4.387,5.943) C38(4.952,5.943) C40(5.519,5.943) D1(-5.519,5.66) D3(-4.952,5.66) D5(-4.387,5.66) D7(-3.821,5.66) D9(-3.254,5.66) D11(-2.689,5.66) D13(-2.123,5.66) D15(-1.556,5.66) D17(-0.991,5.66) D19(-0.425,5.66) D21(0.142,5.66) D23(0.707,5.66) D25(1.274,5.66) D27(1.84,5.66) D29(2.405,5.66) D31(2.972,5.66) D33(3.538,5.66) D35(4.103,5.66) D37(4.67,5.66) D39(5.235,5.66) E2(-5.235,5.377) E4(-4.67,5.377) E6(-4.103,5.377) E8(-3.538,5.377) E10(-2.972,5.377) E12(-2.405,5.377) E14(-1.84,5.377) E16(-1.274,5.377) E18(-0.707,5.377) E20(-0.142,5.377) E22(0.425,5.377) E24(0.991,5.377) E26(1.556,5.377) E28(2.123,5.377) E30(2.689,5.377) E32(3.254,5.377) E34(3.821,5.377) E36(4.387,5.377) E38(4.952,5.377) E40(5.519,5.377) F1(-5.519,5.094) F3(-4.952,5.094) F5(-4.387,5.094) F7(-3.821,5.094) F11(-2.689,5.094) F15(-1.556,5.094) F17(-0.991,5.094) F19(-0.425,5.094) F21(0.142,5.094) F23(0.707,5.094) F25(1.274,5.094) F27(1.84,5.094) F29(2.405,5.094) F31(2.972,5.094) F33(3.538,5.094) F35(4.103,5.094) F37(4.67,5.094) F39(5.235,5.094) G2(-5.235,4.811) G4(-4.67,4.811) G6(-4.103,4.811) G8(-3.538,4.811) G10(-2.972,4.811) G12(-2.405,4.811) G14(-1.84,4.811) G16(-1.274,4.811) G18(-0.707,4.811) G20(-0.142,4.811) G22(0.425,4.811) G24(0.991,4.811) G26(1.556,4.811) G28(2.123,4.811) G30(2.689,4.811) G32(3.254,4.811) G34(3.821,4.811) G36(4.387,4.811) G38(4.952,4.811) G40(5.519,4.811) H1(-5.519,4.528) H3(-4.952,4.528) H5(-4.387,4.528) H7(-3.821,4.528) H11(-2.689,4.528) H13(-2.123,4.528) H15(-1.556,4.528) H17(-0.991,4.528) H19(-0.425,4.528) H21(0.142,4.528) H23(0.707,4.528) H25(1.274,4.528) H27(1.84,4.528) H29(2.405,4.528) H31(2.972,4.528) H33(3.538,4.528) H35(4.103,4.528) H37(4.67,4.528) H39(5.235,4.528) J2(-5.235,4.245) J4(-4.67,4.245) J6(-4.103,4.245) J8(-3.538,4.245) J10(-2.972,4.245) J12(-2.405,4.245) J14(-1.84,4.245) J16(-1.274,4.245) J18(-0.707,4.245) J20(-0.142,4.245) J22(0.425,4.245) J24(0.991,4.245) J26(1.556,4.245) J28(2.123,4.245) J30(2.689,4.245) J32(3.254,4.245) J34(3.821,4.245) J36(4.387,4.245) J38(4.952,4.245) J40(5.519,4.245) K1(-5.519,3.679) K3(-4.952,3.679) K5(-4.387,3.679) K7(-3.821,3.679) K9(-3.254,3.679) K11(-2.689,3.679) K15(-1.556,3.679) K17(-0.991,3.679) K19(-0.425,3.679) K21(0.142,3.679) K23(0.707,3.679) K25(1.274,3.679) K27(1.84,3.679) K29(2.405,3.679) K31(2.972,3.679) K33(3.538,3.679) K35(4.103,3.679) K37(4.67,3.679) K39(5.235,3.679) L2(-5.235,3.396) L4(-4.67,3.396) L6(-4.103,3.396) L8(-3.538,3.396) L30(2.689,3.396) L32(3.254,3.396) L34(3.821,3.396) L36(4.387,3.396) L38(4.952,3.396) L40(5.519,3.396) M1(-5.519,3.113) M3(-4.952,3.113) M5(-4.387,3.113) M7(-3.821,3.113) M9(-3.254,3.113) M11(-2.689,3.113) M13(-2.123,3.113) M15(-1.556,3.113) M17(-0.991,3.113) M19(-0.425,3.113) M21(0.142,3.113) M23(0.707,3.113) M25(1.274,3.113) M27(1.84,3.113) M29(2.405,3.113) M31(2.972,3.113) M33(3.538,3.113) M35(4.103,3.113) M37(4.67,3.113) M39(5.235,3.113) N2(-5.235,2.83) N4(-4.67,2.83) N6(-4.103,2.83) N8(-3.538,2.83) N14(-1.84,2.83) N22(0.425,2.83) N24(0.991,2.83) N26(1.556,2.83) N28(2.123,2.83) N30(2.689,2.83) N32(3.254,2.83) N34(3.821,2.83) N36(4.387,2.83) N38(4.952,2.83) N40(5.519,2.83) P3(-4.952,2.547) P5(-4.387,2.547) P7(-3.821,2.547) P9(-3.254,2.547) P11(-2.689,2.547) P13(-2.123,2.547) P15(-1.556,2.547) P17(-0.991,2.547) P19(-0.425,2.547) P21(0.142,2.547) P23(0.707,2.547) P25(1.274,2.547) P27(1.84,2.547) P29(2.405,2.547) P31(2.972,2.547) P33(3.538,2.547) P35(4.103,2.547) P37(4.67,2.547) P39(5.235,2.547) R4(-4.67,2.264) R6(-4.103,2.264) R8(-3.538,2.264) R22(0.425,2.264) R24(0.991,2.264) R26(1.556,2.264) R28(2.123,2.264) R30(2.689,2.264) R32(3.254,2.264) R34(3.821,2.264) R36(4.387,2.264) R38(4.952,2.264) R40(5.519,2.264) T1(-5.519,1.981) T3(-4.952,1.981) T5(-4.387,1.981) T7(-3.821,1.981) T9(-3.254,1.981) T11(-2.689,1.981) T13(-2.123,1.981) T15(-1.556,1.981) T17(-0.991,1.981) T19(-0.425,1.981) T21(0.142,1.981) T23(0.707,1.981) T25(1.274,1.981) T27(1.84,1.981) T29(2.405,1.981) T31(2.972,1.981) T33(3.538,1.981) T35(4.103,1.981) T37(4.67,1.981) T39(5.235,1.981) U2(-5.235,1.698) U4(-4.67,1.698) U6(-4.103,1.698) U8(-3.538,1.698) U22(0.425,1.698) U24(0.991,1.698) U26(1.556,1.698) U28(2.123,1.698) U30(2.689,1.698) U32(3.254,1.698) U34(3.821,1.698) U36(4.387,1.698) U38(4.952,1.698) U40(5.519,1.698) V1(-5.519,1.415) V3(-4.952,1.415) V5(-4.387,1.415) V7(-3.821,1.415) V9(-3.254,1.415) V11(-2.689,1.415) V13(-2.123,1.415) V15(-1.556,1.415) V17(-0.991,1.415) V19(-0.425,1.415) V21(0.142,1.415) V23(0.707,1.415) V25(1.274,1.415) V27(1.84,1.415) V29(2.405,1.415) V31(2.972,1.415) V33(3.538,1.415) V35(4.103,1.415) V37(4.67,1.415) V39(5.235,1.415) W2(-5.235,1.132) W4(-4.67,1.132) W6(-4.103,1.132) W8(-3.538,1.132) W16(-1.274,1.132) W22(0.425,1.132) W24(0.991,1.132) W26(1.556,1.132) W28(2.123,1.132) W30(2.689,1.132) W32(3.254,1.132) W34(3.821,1.132) W36(4.387,1.132) W38(4.952,1.132) W40(5.519,1.132) Y1(-5.519,0.849) Y3(-4.952,0.849) Y5(-4.387,0.849) Y9(-3.254,0.849) Y11(-2.689,0.849) Y13(-2.123,0.849) Y15(-1.556,0.849) Y17(-0.991,0.849) Y19(-0.425,0.849) Y21(0.142,0.849) Y23(0.707,0.849) Y25(1.274,0.849) Y27(1.84,0.849) Y29(2.405,0.849) Y31(2.972,0.849) Y33(3.538,0.849) Y35(4.103,0.849) Y37(4.67,0.849) Y39(5.235,0.849)
  silkscreen extent -6.17,-7 6,7.17
PM-8916-0-176NSP-TR-00-0 [mm]
  round 0.24 smd paste+0.005 mask+0.038: A1(-2.6,2.6) A2(-2.2,2.6) A3(-1.8,2.6) A4(-1.4,2.6) A5(-1,2.6) A6(-0.6,2.6) A7(-0.2,2.6) A8(0.2,2.6) A9(0.6,2.6) A10(1,2.6) A11(1.4,2.6) A12(1.8,2.6) A13(2.2,2.6) A14(2.6,2.6) B1(-2.6,2.2) B2(-2.2,2.2) B3(-1.8,2.2) B4(-1.4,2.2) B5(-1,2.2) B6(-0.6,2.2) B7(-0.2,2.2) B8(0.2,2.2) B9(0.6,2.2) B10(1,2.2) B11(1.4,2.2) B12(1.8,2.2) B13(2.2,2.2) B14(2.6,2.2) C1(-2.6,1.8) C2(-2.2,1.8) C3(-1.8,1.8) C4(-1.4,1.8) C5(-1,1.8) C6(-0.6,1.8) C7(-0.2,1.8) C8(0.2,1.8) C9(0.6,1.8) C11(1.4,1.8) C12(1.8,1.8) C13(2.2,1.8) C14(2.6,1.8) D1(-2.6,1.4) D2(-2.2,1.4) D3(-1.8,1.4) D4(-1.4,1.4) D5(-1,1.4) D6(-0.6,1.4) D7(-0.2,1.4) D10(1,1.4) D11(1.4,1.4) D12(1.8,1.4) D13(2.2,1.4) D14(2.6,1.4) E1(-2.6,1) E2(-2.2,1) E3(-1.8,1) E4(-1.4,1) E5(-1,1) E7(-0.2,1) E8(0.2,1) E9(0.6,1) E10(1,1) E11(1.4,1) E12(1.8,1) E13(2.2,1) E14(2.6,1) F1(-2.6,0.6) F2(-2.2,0.6) F3(-1.8,0.6) F5(-1,0.6) F7(-0.2,0.6) F8(0.2,0.6) F9(0.6,0.6) F10(1,0.6) F11(1.4,0.6) F12(1.8,0.6) F13(2.2,0.6) F14(2.6,0.6) G1(-2.6,0.2) G2(-2.2,0.2) G3(-1.8,0.2) G4(-1.4,0.2) G5(-1,0.2) G6(-0.6,0.2) G7(-0.2,0.2) G8(0.2,0.2) G9(0.6,0.2) G10(1,0.2) G11(1.4,0.2) G12(1.8,0.2) G13(2.2,0.2) G14(2.6,0.2) H2(-2.2,-0.2) H3(-1.8,-0.2) H5(-1,-0.2) H6(-0.6,-0.2) H7(-0.2,-0.2) H8(0.2,-0.2) H10(1,-0.2) H11(1.4,-0.2) H12(1.8,-0.2) H13(2.2,-0.2) J1(-2.6,-0.6) J2(-2.2,-0.6) J3(-1.8,-0.6) J4(-1.4,-0.6) J5(-1,-0.6) J6(-0.6,-0.6) J7(-0.2,-0.6) J8(0.2,-0.6) J10(1,-0.6) J11(1.4,-0.6) J12(1.8,-0.6) J13(2.2,-0.6) J14(2.6,-0.6) K1(-2.6,-1) K2(-2.2,-1) K3(-1.8,-1) K4(-1.4,-1) K5(-1,-1) K8(0.2,-1) K9(0.6,-1) K10(1,-1) K11(1.4,-1) K13(2.2,-1) K14(2.6,-1) L1(-2.6,-1.4) L2(-2.2,-1.4) L3(-1.8,-1.4) L4(-1.4,-1.4) L8(0.2,-1.4) L10(1,-1.4) L11(1.4,-1.4) L12(1.8,-1.4) L13(2.2,-1.4) M1(-2.6,-1.8) M2(-2.2,-1.8) M3(-1.8,-1.8) M4(-1.4,-1.8) M5(-1,-1.8) M6(-0.6,-1.8) M7(-0.2,-1.8) M8(0.2,-1.8) M9(0.6,-1.8) M10(1,-1.8) M11(1.4,-1.8) M12(1.8,-1.8) M13(2.2,-1.8) M14(2.6,-1.8) N1(-2.6,-2.2) N2(-2.2,-2.2) N3(-1.8,-2.2) N4(-1.4,-2.2) N5(-1,-2.2) N6(-0.6,-2.2) N7(-0.2,-2.2) N8(0.2,-2.2) N9(0.6,-2.2) N10(1,-2.2) N11(1.4,-2.2) N12(1.8,-2.2) N13(2.2,-2.2) N14(2.6,-2.2) P1(-2.6,-2.6) P2(-2.2,-2.6) P3(-1.8,-2.6) P4(-1.4,-2.6) P5(-1,-2.6) P6(-0.6,-2.6) P7(-0.2,-2.6) P8(0.2,-2.6) P9(0.6,-2.6) P10(1,-2.6) P12(1.8,-2.6) P13(2.2,-2.6) P14(2.6,-2.6)
  silkscreen extent -3.23,-3.1 3.1,3.24
R0201 [mm]
  rect 0.25x0.3 smd mask+0.05: 1(-0.275,0) 2(0.275,0)
  silkscreen extent -0.3,-0.15 0.3,0.15
r0402 [mm]
  rect 0.55x0.55 smd paste-0.05 mask+0.05: 1(-0.45,0) 2(0.45,0)
  silkscreen extent -0.5,-0.25 0.5,0.25
RAD-0.3 [mm] "Radial Cap, Thru-Hole; 2 Leads; 0.3 in Pin Spacing"
  round 1.2 hole 0.7: 1(-3.81,0) 2(3.81,0)
  silkscreen extent -5.71,-1.91 5.71,1.91
SPST-2 [mm] "Switch; 2 Leads"
  rect 1.85x1.85 hole 1.1: 1(-2.54,0)
  round 1.85 hole 1.1: 2(2.54,0)
  silkscreen extent -4.89,-1.27 4.28,1.27
TP [mm]
  round 1.8 hole 1.2: 1(0,0)
  silkscreen extent -1.14,-1.14 1.14,1.14
WCN-3620-0-61WLNSP-TR-05-0 [mm]
  round 0.25 smd mask+0.035: 1(-1.275,1.46) 2(-0.709,1.46) 3(-0.143,1.46) 4(0.423,1.46) 5(0.989,1.46) 6(1.555,1.46) 7(-1.558,1.178) 8(-0.992,1.178) 9(0.14,1.178) 10(0.706,1.178) 11(1.272,1.178) 12(-1.275,0.894) 13(-0.709,0.894) 14(-0.143,0.894) 15(1.555,0.894) 16(-1.558,0.611) 17(-0.992,0.611) 18(-0.426,0.611) 19(0.14,0.611) 20(0.706,0.611) 21(1.272,0.611) 22(-1.275,0.329) 23(-0.709,0.329) 24(-0.143,0.329) 25(0.423,0.329) 26(0.989,0.329) 27(1.555,0.329) 28(-1.558,0.045) 29(-0.992,0.045) 30(-0.426,0.045) 31(0.706,0.045) 32(1.272,0.045) 33(-1.275,-0.238) 34(-0.709,-0.238) 35(-0.143,-0.238) 36(0.423,-0.238) 37(1.555,-0.238) 38(-1.558,-0.52) 39(-0.992,-0.52) 40(-0.426,-0.52) 41(0.14,-0.52) 42(0.706,-0.52) 43(1.272,-0.52) 44(-1.275,-0.804) 45(-0.709,-0.804) 46(-0.143,-0.804) 47(0.423,-0.804) 48(0.989,-0.804) 49(1.555,-0.804) 50(-1.558,-1.087) 51(-0.992,-1.087) 52(-0.426,-1.087) 53(0.14,-1.087) 54(0.706,-1.087) 55(1.272,-1.087) 56(-1.275,-1.369) 57(-0.709,-1.369) 58(-0.143,-1.369) 59(0.423,-1.369) 60(0.989,-1.369) 61(1.555,-1.369)
  silkscreen extent -1.97,-1.66 1.78,1.82